# Altium PCB main.PcbDoc (part 1 of 3)
Units mm, origin at the board's own origin, x right, y up, seen from the top; angles counter-clockwise.
Board outline 126 x 86 mm, 2 copper layers (Top Layer, Bottom Layer); 214 components, 256 nets, 850 pads, 614 vias.
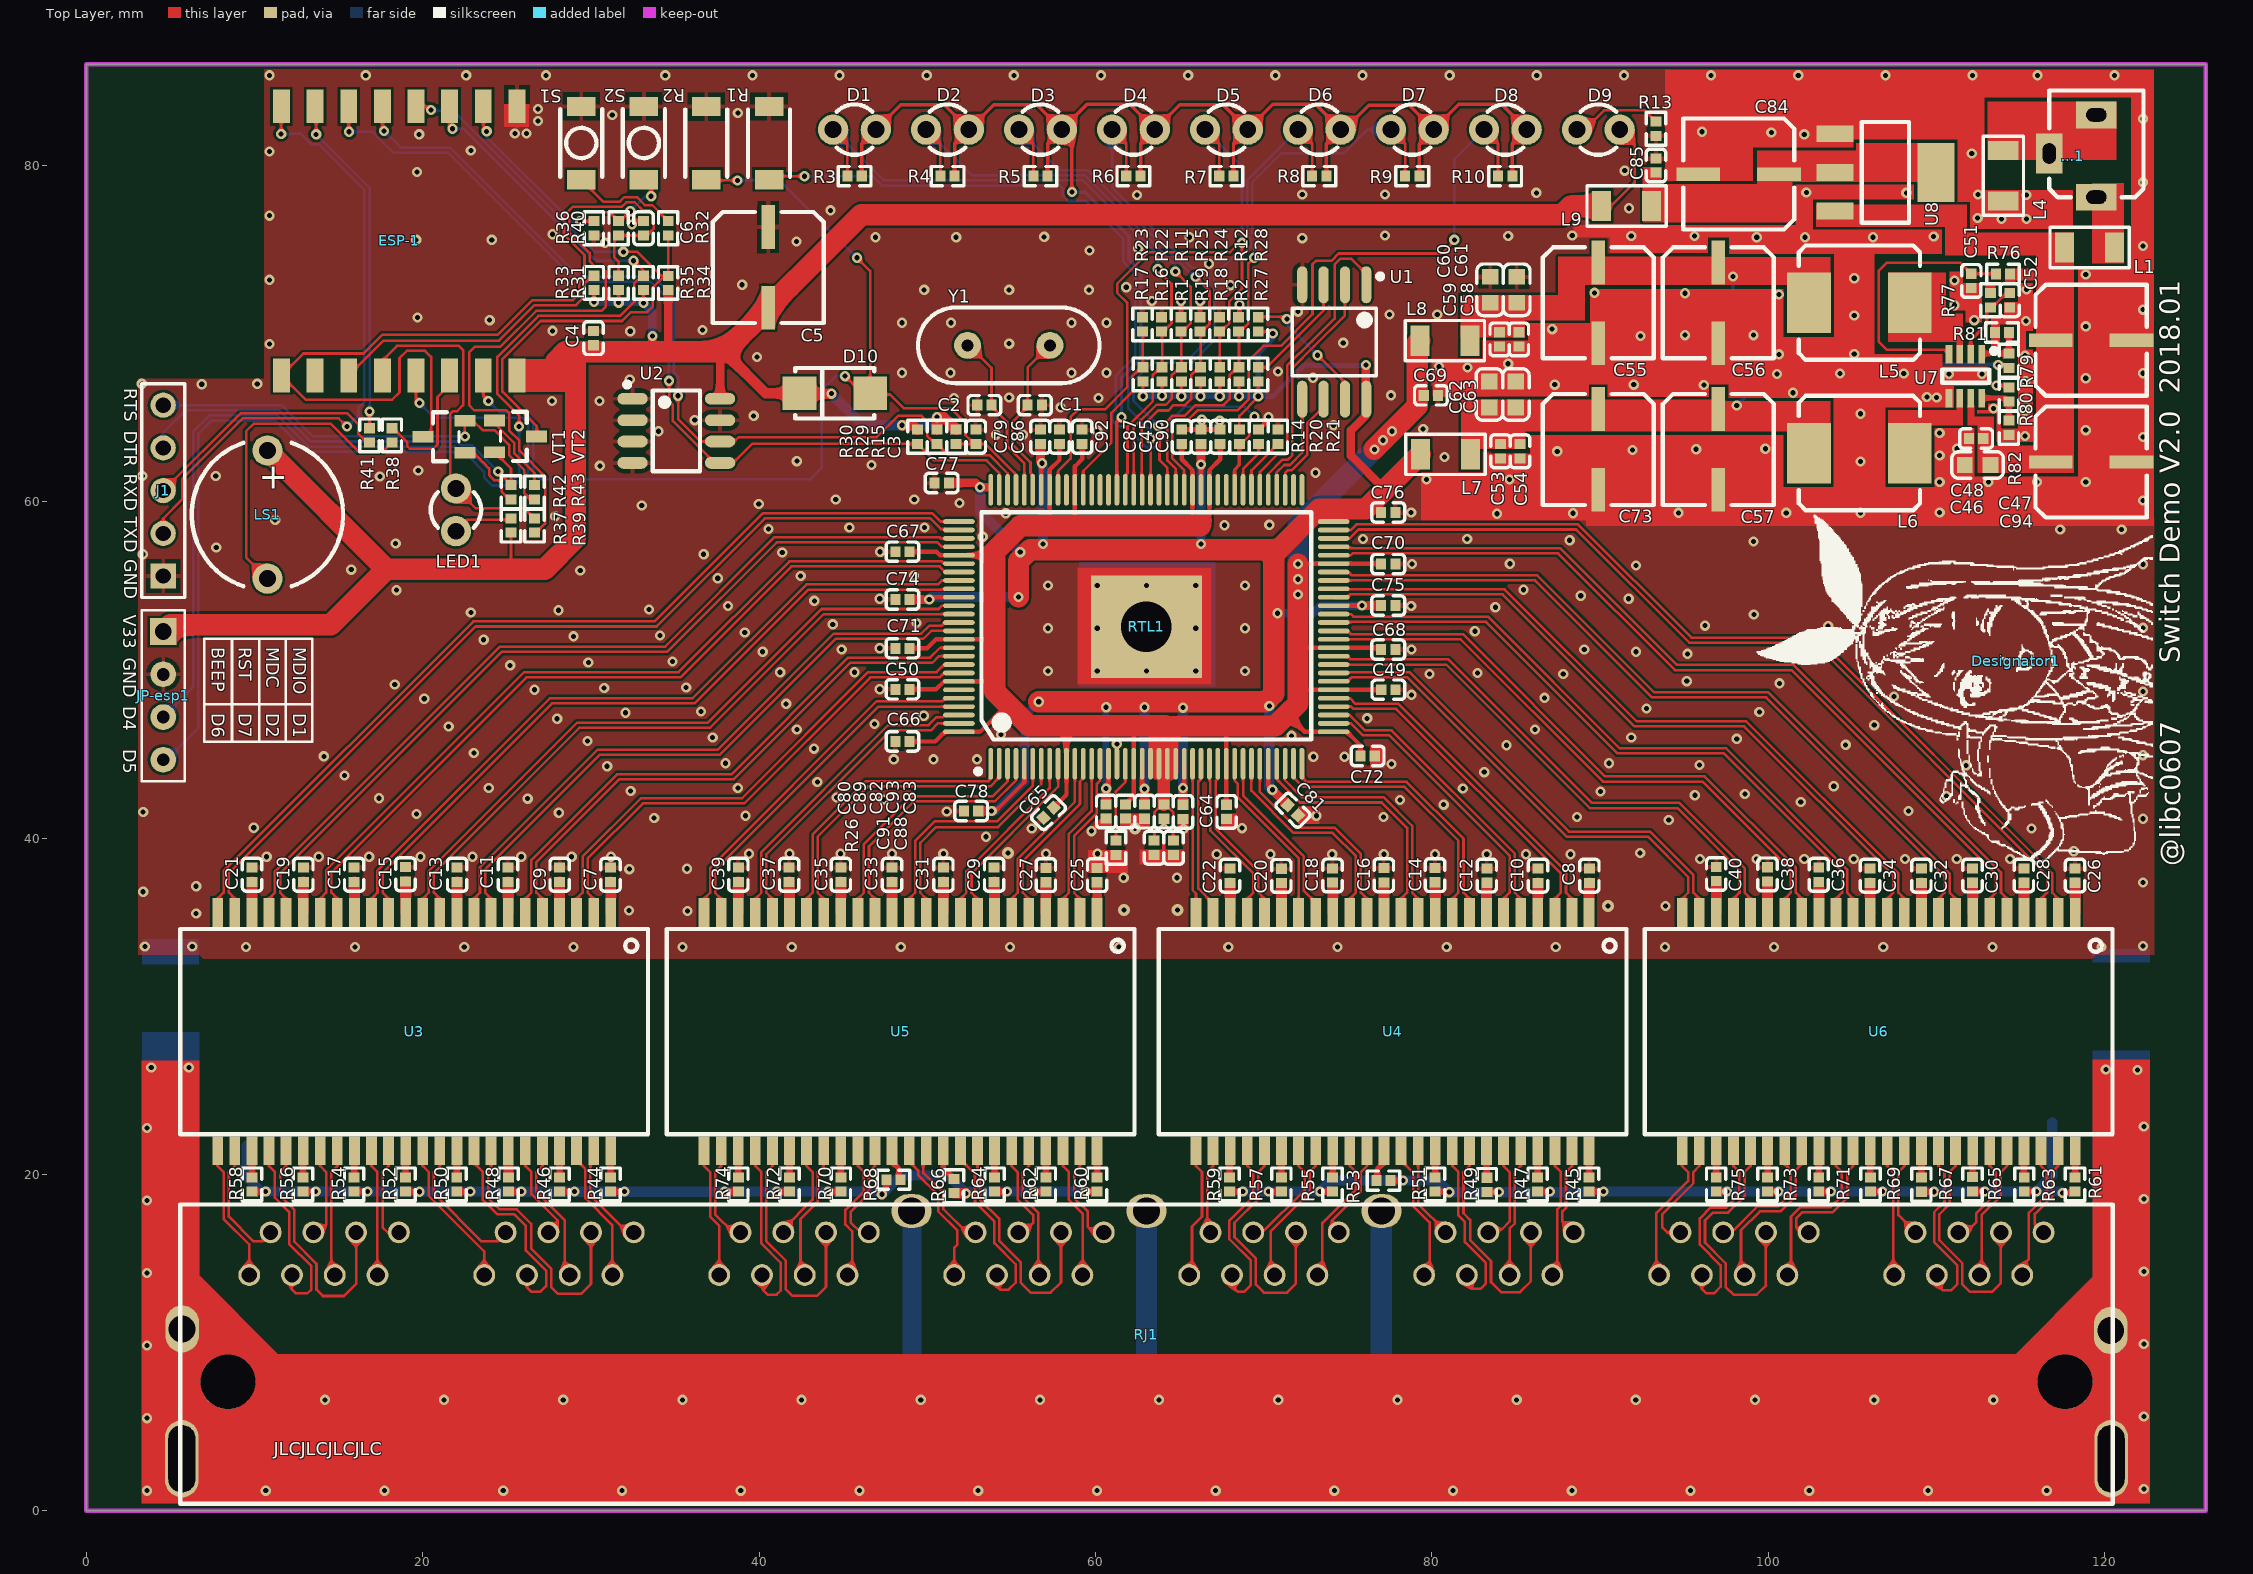
[diagram p0: Top Layer view]
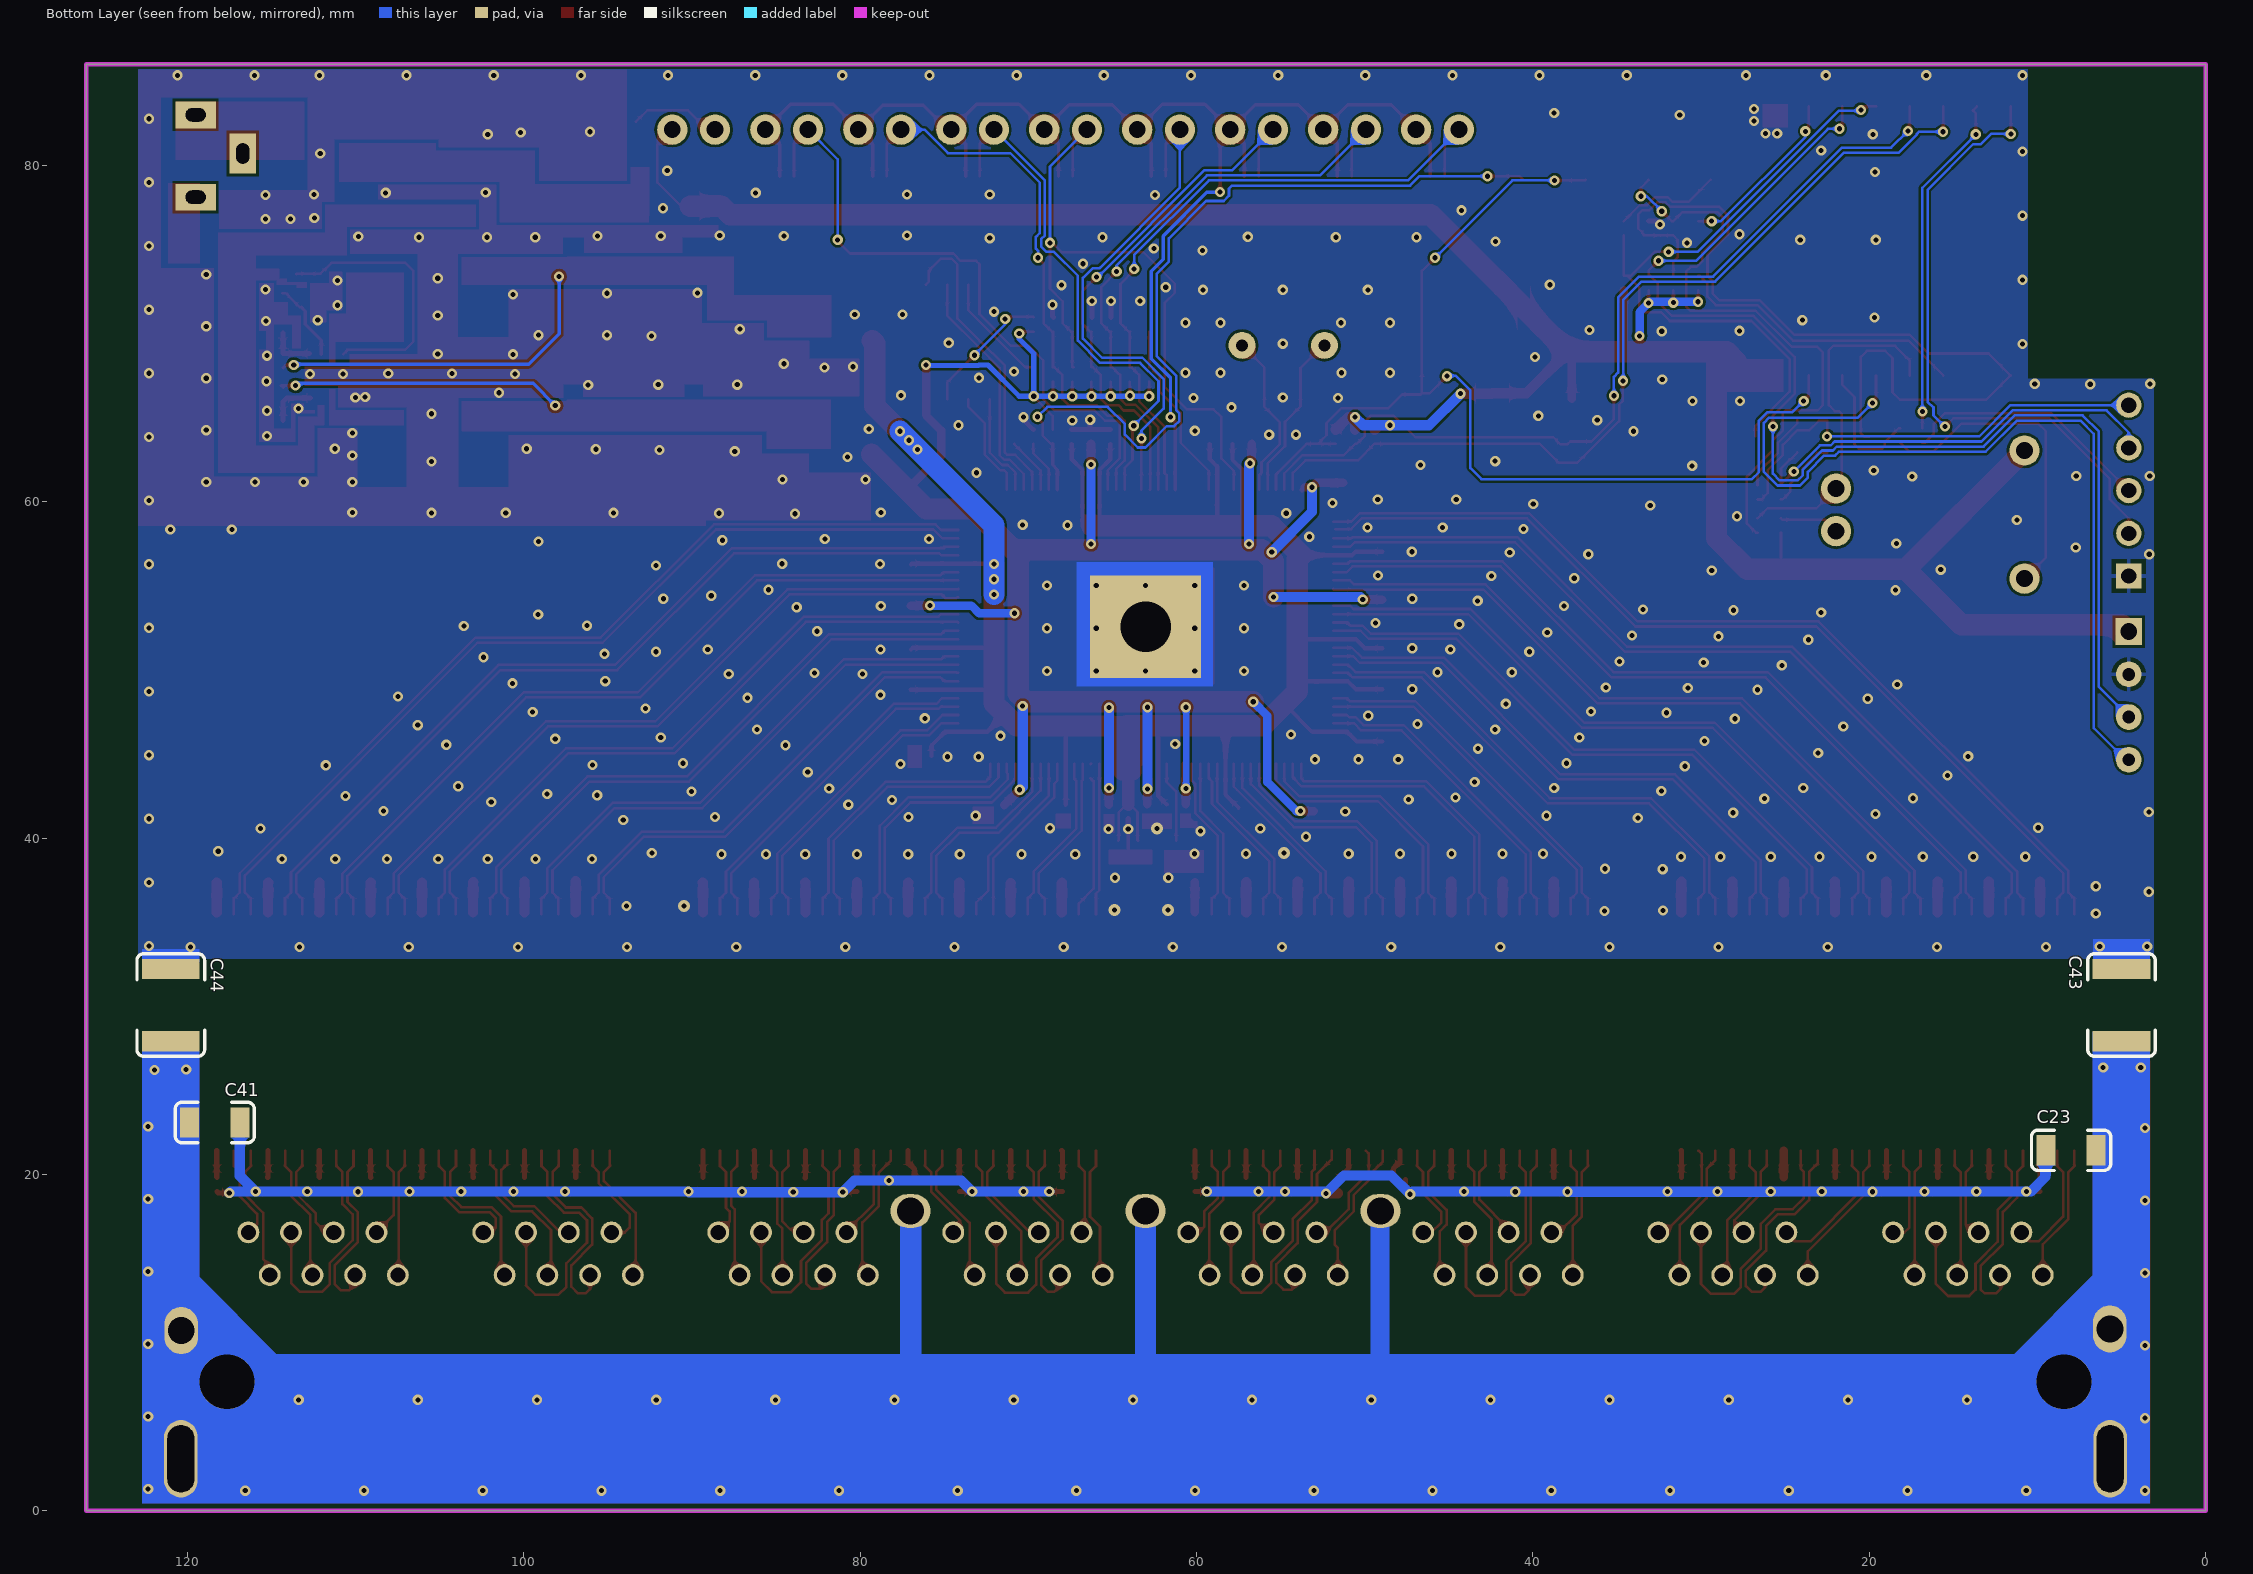
[diagram p1: Bottom Layer view, seen from below]
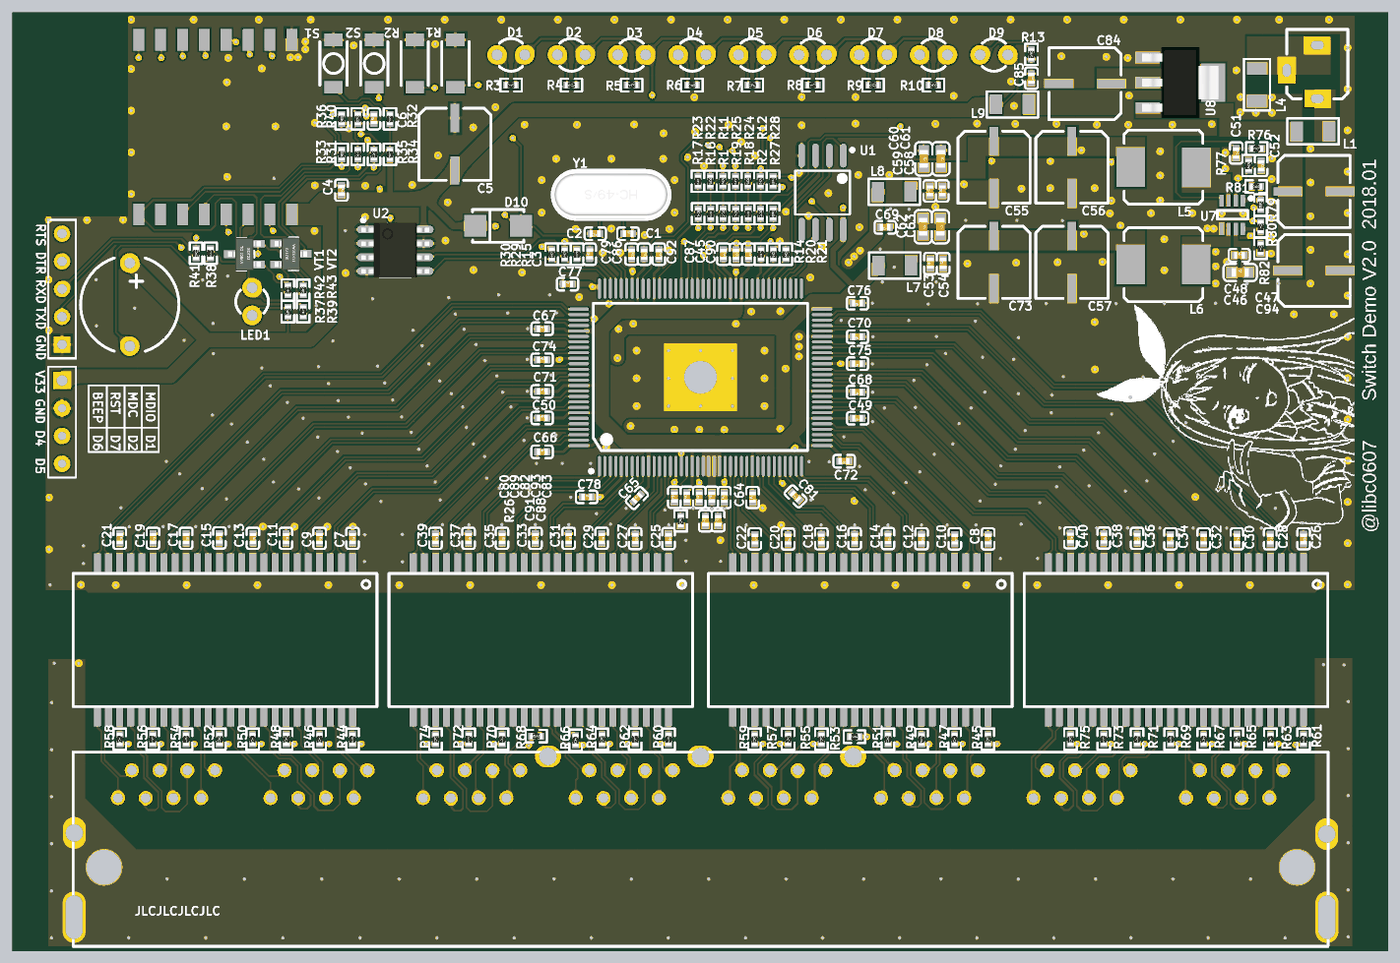
[diagram p4: 3D render of the assembled board from above, using the file's embedded part models]
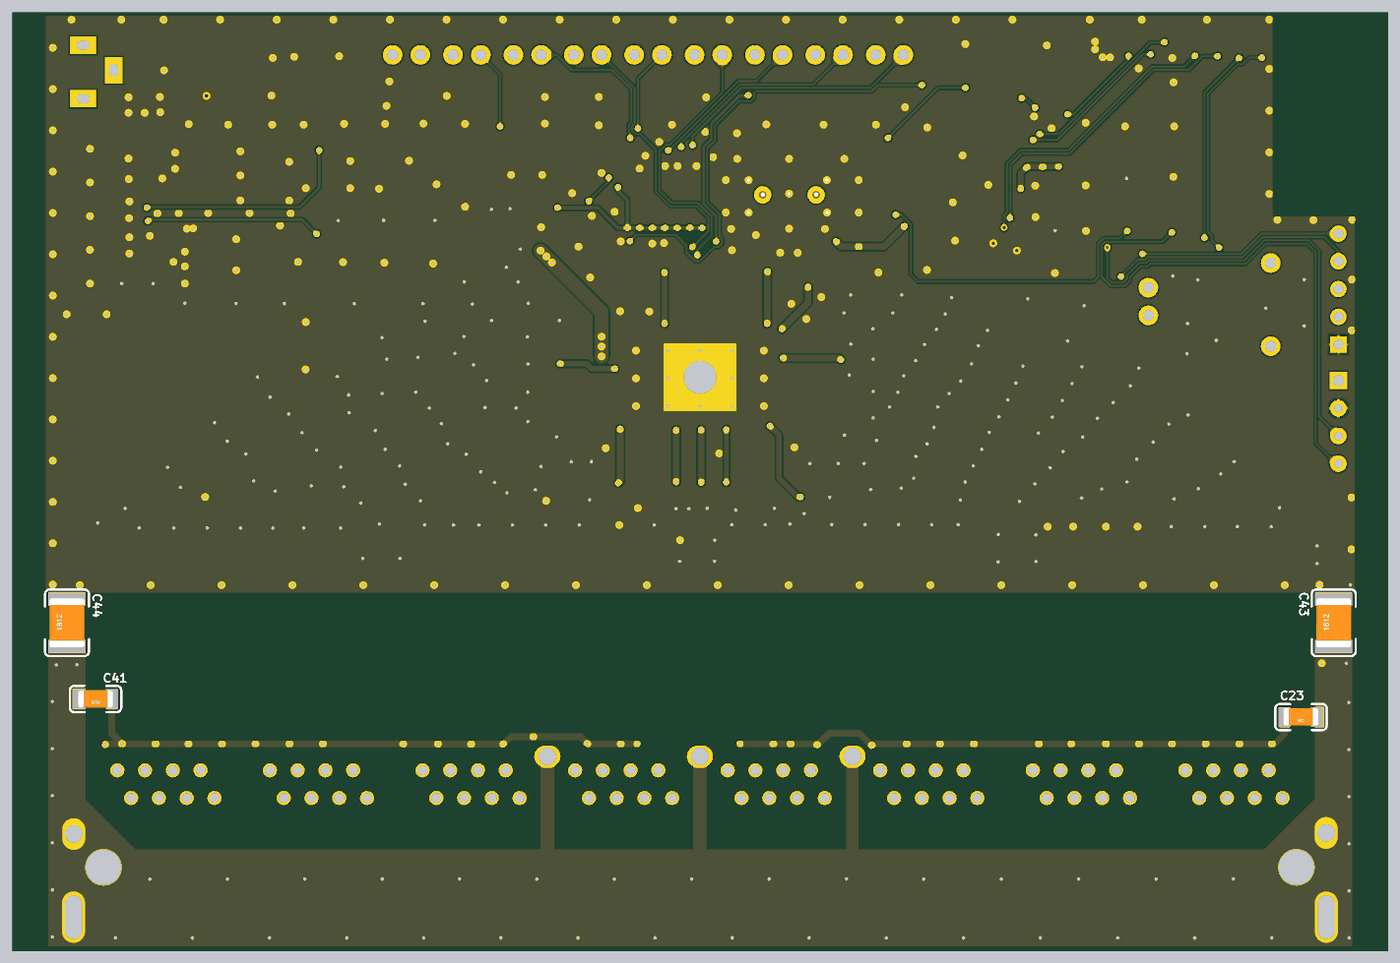
[diagram p5: 3D render of the assembled board from below, using the file's embedded part models]

## Layer stack, top to bottom
Top Solder: solder mask 0.0102, Solder Resist, Dk 3.5
Top Layer: signal copper 0.0356
Dielectric 1: dielectric 0.32, FR-4, Dk 4.8
Bottom Layer: signal copper 0.0356
Bottom Solder: solder mask 0.0102, Solder Resist, Dk 3.5

## Board outline
0,0 0,86 126,86 126,0

## Design rules (kind name [scope] priority, off if disabled: settings)
Clearance [All] p1: gap=0.152 ignorepadtopadclearanceinfootprint=FALSE except(0: Arc-Hole Track-Hole SMDPad-Hole THPad-Hole Via-Hole Fill-Hole Poly-Hole Region-Hole Text-Hole)
ComponentClearance [All] p1: gap=0 collisioncheckmode=3 verticalgap=0 showdistances=FALSE
DiffPairsRouting [All] p1: maxlimit=0.254 minlimit=0.152 mostfreqgap=0.152 toplayer_minwidth=0.152 toplayer_maxwidth=0.254 toplayer_prefwidth=0.152 bottomlayer_minwidth=0.152 bottomlayer_maxwidth=0.254 bottomlayer_prefwidth=0.152 maxuncoupledlength=12.7
HoleSize [All] p1: absolutevalues=TRUE maxlimit=3.81 minlimit=0.305 maxpercent=80.000 minpercent=20.000
HoleToHoleClearance [All] p1: gap=0 allowstackedmicrovias=TRUE
MinimumSolderMaskSliver [All] p1: minsoldermaskwidth=0
PlaneClearance [All] p1: clearance=0.254
PolygonConnect IsVia [IsVia] p1: connectstyle=Direct reliefconductorwidth=0.254 reliefentries=4 polygonreliefangle="90 Angle" airgapwidth=0.254
PolygonConnect [All] p2: connectstyle=Relief reliefconductorwidth=0.254 reliefentries=4 polygonreliefangle="90 Angle" airgapwidth=0.254
RoutingCorners [All] p1: cornerstyle=45-Degree minsetback=1.524 maxsetback=2.54
RoutingVias [All] p1: holewidth=0.305 width=0.711 viastyle="Through Hole" minholewidth=0.305 minwidth=0.61 maxholewidth=0.711 maxwidth=1.27
SilkToSilkClearance [All] p1: silktosilkclearance=0
SilkToSolderMaskClearance [IsPad] p1: minsilkscreentomaskgap=0 clearancetoexposedcopper=TRUE
SolderMaskExpansion [All] p1: expansion=0.051
UnpouredPolygon [All] p1: allowunpoured=TRUE allowshelved=TRUE
Width [All] p1: maxlimit=1.27 minlimit=0.152 preferedwidth=0.152
20 further rules are at their usual default settings.

## Classes and differential pairs
component class rj45: RJ1
component class power: ...1 C45 C46 C47 C48 C49 C50 C51 C52 C53 C54 C55 C56 C57 C58 C59 C60 C61 C62 C63 C64 C65 C66 C67 C68 C69 C70 C71 C72 C73 C74 C75 C76 C77 C78 C79 C80 C81 C82 C83 C84 C85 C86 C87 C88 C89 C90 C91 C92 C93 C94 L1 L4 L5 L6 L7 L8 L9 R76 R77 R79 R80 R81 R82 U7 U8
component class mdi: C7 C8 C9 C10 C11 C12 C13 C14 C15 C16 C17 C18 C19 C20 C21 C22 C23 C25 C26 C27 C28 C29 C30 C31 C32 C33 C34 C35 C36 C37 C38 C39 C40 C41 C43 C44 R44 R45 R46 R47 R48 R49 R50 R51 R52 R53 R54 R55 R56 R57 R58 R59 R60 R61 R62 R63 R64 R65 R66 R67 R68 R69 R70 R71 R72 R73 R74 R75 RTL1 U3 U4 U5 U6
component class mcu: C4 C5 C6 ESP-1 J1 J3 JP-esp1 K LED1 LS1 R31 R32 R33 R34 R35 R36 R37 R38 R39 R40 R41 R42 R43 S1 S2 VT1 VT2
component class config: C1 C2 C3 D1 D2 D3 D4 D5 D6 D7 D8 D9 D10 R1 R2 R3 R4 R5 R6 R7 R8 R9 R10 R11 R12 R13 R14 R15 R16 R17 R18 R19 R20 R21 R22 R23 R24 R25 R26 R27 R28 R29 R30 S-firstboot(SR1 SRESET1 U1 U2 Y1
differential pair P7D: +P7D_P -P7D_N
differential pair P7C: +P7C_P -P7C_N
differential pair P7B: +P7B_P -P7B_N
differential pair P7A: +P7A_P -P7A_N
differential pair P6D: +P6D_P -P6D_N
differential pair P6C: +P6C_P -P6C_N
differential pair P6B: +P6B_P -P6B_N
differential pair P6A: +P6A_P -P6A_N
differential pair P5D: +P5D_P -P5D_N
differential pair P5C: +P5C_P -P5C_N
differential pair P5B: +P5B_P -P5B_N
differential pair P5A: +P5A_P -P5A_N
differential pair P4D: +P4D_P -P4D_N
differential pair P4C: +P4C_P -P4C_N
differential pair P4B: +P4B_P -P4B_N
differential pair P4A: +P4A_P -P4A_N
differential pair P3D: +P3D_P -P3D_N
differential pair P3C: +P3C_P -P3C_N
differential pair P3B: +P3B_P -P3B_N
differential pair P3A: +P3A_P -P3A_N
differential pair P2D: +P2D_P -P2D_N
differential pair P2C: +P2C_P -P2C_N
differential pair P2B: +P2B_P -P2B_N
differential pair P2A: +P2A_P -P2A_N
differential pair P1D: +P1D_P -P1D_N
differential pair P1C: +P1C_P -P1C_N
differential pair P1B: +P1B_P -P1B_N
differential pair P1A: +P1A_P -P1A_N
differential pair P0D: +P0D_P -P0D_N
differential pair P0C: +P0C_P -P0C_N
differential pair P0B: +P0B_P -P0B_N
differential pair P0A: +P0A_P -P0A_N
differential pair N7D: +N7D_P -N7D_N
differential pair N7C: +N7C_P -N7C_N
differential pair N7B: +N7B_P -N7B_N
differential pair N7A: +N7A_P -N7A_N
differential pair N6D: +N6D_P -N6D_N
differential pair N6C: +N6C_P -N6C_N
differential pair N6B: +N6B_P -N6B_N
differential pair N6A: +N6A_P -N6A_N
differential pair N5D: +N5D_P -N5D_N
differential pair N5C: +N5C_P -N5C_N
differential pair N5B: +N5B_P -N5B_N
differential pair N5A: +N5A_P -N5A_N
differential pair N4D: +N4D_P -N4D_N
differential pair N4C: +N4C_P -N4C_N
differential pair N4B: +N4B_P -N4B_N
differential pair N4A: +N4A_P -N4A_N
differential pair N3D: +N3D_P -N3D_N
differential pair N3C: +N3C_P -N3C_N
differential pair N3B: +N3B_P -N3B_N
differential pair N3A: +N3A_P -N3A_N
differential pair N2D: +N2D_P -N2D_N
differential pair N2C: +N2C_P -N2C_N
differential pair N2B: +N2B_P -N2B_N
differential pair N2A: +N2A_P -N2A_N
differential pair N1D: +N1D_P -N1D_N
differential pair N1C: +N1C_P -N1C_N
differential pair N1B: +N1B_P -N1B_N
differential pair N1A: +N1A_P -N1A_N
differential pair N0D: +N0D_P -N0D_N
differential pair N0C: +N0C_P -N0C_N
differential pair N0B: +N0B_P -N0B_N
differential pair N0A: +N0A_P -N0A_N

## Components (designator, comment, footprint, x,y, rotation, side; value= is the part's Value field where it differs from the comment)
...1 "DC插座" 3.5x1.3-DC插座 119.5,78.1 r270 top locked
C1 "Cap" 0402_C 56.388,65.735 r0 top value=27pF
C2 "Cap" 0402_C 53.391,65.735 r180 top value=27pF
C3 "Cap" 0402_C 52.883,63.856 r90 top value=0.1uF
C4 "100nF" 0402_C 30.15,69.723 r270 top
C5 "100uF" 6.3mm贴片铝电解 43.838,70.627 r90 top
C6 "100nF" 0402_C 33.122,76.251 r90 top
C7 "Cap" 0402_C 31.166,37.821 r270 top value=100pF
C8 "Cap" 0402_C 89.357,37.763 r270 top value=100pF
C9 "Cap" 0402_C 28.143,37.821 r270 top value=100pF
C10 "Cap" 0402_C 86.309,37.763 r270 top value=100pF
C11 "Cap" 0402_C 25.07,37.821 r270 top value=100pF
C12 "Cap" 0402_C 83.261,37.77 r270 top value=100pF
C13 "Cap" 0402_C 22.047,37.821 r270 top value=100pF
C14 "Cap" 0402_C 80.188,37.795 r270 top value=100pF
C15 "Cap" 0402_C 18.974,37.846 r270 top value=100pF
C16 "Cap" 0402_C 77.14,37.788 r270 top value=100pF
C17 "Cap" 0402_C 15.926,37.821 r270 top value=100pF
C18 "Cap" 0402_C 74.092,37.777 r270 top value=100pF
C19 "Cap" 0402_C 12.903,37.821 r270 top value=100pF
C20 "Cap" 0402_C 71.044,37.751 r270 top value=100pF
C21 "Cap" 0402_C 9.855,37.821 r270 top value=100pF
C22 "Cap" 0402_C 67.996,37.763 r270 top value=100pF
C23 "Cap" 1206_C 8.001,21.438 r0 bottom value=100pF
C25 "Cap" 0402_C 60.096,37.795 r270 top value=100pF
C26 "Cap" 0402_C 118.237,37.77 r270 top value=100pF
C27 "Cap" 0402_C 57.048,37.795 r270 top value=100pF
C28 "Cap" 0402_C 115.189,37.77 r270 top value=100pF
C29 "Cap" 0402_C 53.975,37.821 r270 top value=100pF
C30 "Cap" 0402_C 112.141,37.77 r270 top value=100pF
C31 "Cap" 0402_C 50.952,37.821 r270 top value=100pF
C32 "Cap" 0402_C 109.093,37.763 r270 top value=100pF
C33 "Cap" 0402_C 47.904,37.821 r270 top value=100pF
C34 "Cap" 0402_C 106.045,37.763 r270 top value=100pF
C35 "Cap" 0402_C 44.856,37.821 r270 top value=100pF
C36 "Cap" 0402_C 102.997,37.814 r270 top value=100pF
C37 "Cap" 0402_C 41.783,37.821 r270 top value=100pF
C38 "Cap" 0402_C 99.949,37.839 r270 top value=100pF
C39 "Cap" 0402_C 38.76,37.821 r270 top value=100pF
C40 "Cap" 0402_C 96.901,37.865 r270 top value=100pF
C41 "Cap" 1206_C 118.364,23.089 r0 bottom value=100pF
C43 "Cap" 1812_C 5.004,30.074 r90 bottom value=100pF
C44 "Cap" 1812_C 120.98,30.074 r90 bottom value=100pF
C45 "Cap" 0402_C 66.269,63.856 r270 top value=100pF
C46 "Cap" 0603_C 112.438,62.179 r0 top value=100pF
C47 "Cap Pol1" 6.3mm贴片铝电解 122.49,72.896 r180 top value=100pF
C48 "Cap" 0402_C 112.351,63.754 r0 top value=100pF
C49 "Cap" 0402_C 77.412,48.819 r180 top value=100pF
C50 "Cap" 0402_C 48.523,48.844 r0 top value=100pF
C51 "Cap" 0402_C 112.065,73.127 r270 top value=100pF
C52 "Cap" 0402_C 114.351,71.977 r270 top value=100pF
C53 "Cap" 0402_C 84.074,62.999 r90 top value=100pF
C54 "Cap" 0402_C 85.242,62.992 r90 top value=100pF
C55 "Cap Pol1" 6.3mm贴片铝电解 93.191,68.518 r90 top value=100pF
C56 "Cap Pol1" 6.3mm贴片铝电解 100.328,68.518 r90 top value=100pF
C57 "Cap Pol1" 6.3mm贴片铝电解 100.328,59.806 r90 top value=100pF
C58 "Cap" 0402_C 85.166,69.647 r90 top value=100pF
C59 "Cap" 0402_C 84.023,69.647 r90 top value=100pF
C60 "Cap" 0603_C 83.464,72.593 r270 top value=100pF
C61 "Cap" 0603_C 85.039,72.593 r270 top value=100pF
C62 "Cap" 0603_C 83.414,66.37 r270 top value=100pF
C63 "Cap" 0603_C 84.988,66.37 r270 top value=100pF
C64 "Cap" 0402_C 67.793,41.554 r90 top value=100pF
C65 "Cap" 0402_C 57.205,41.508 r45 top value=100pF
C66 "Cap" 0402_C 48.523,45.745 r0 top value=100pF
C67 "Cap" 0402_C 48.523,57.023 r0 top value=100pF
C68 "Cap" 0402_C 77.401,51.206 r180 top value=100pF
C69 "Cap" 0402_C 79.941,66.319 r180 top value=100pF
C70 "Cap" 0402_C 77.401,56.286 r180 top value=100pF
C71 "Cap" 0402_C 48.523,51.283 r0 top value=100pF
C72 "Cap" 0402_C 76.175,44.882 r180 top value=100pF
C73 "Cap Pol1" 6.3mm贴片铝电解 93.191,59.806 r90 top value=100pF
C74 "Cap" 0402_C 48.523,54.178 r0 top value=100pF
C75 "Cap" 0402_C 77.401,53.823 r180 top value=100pF
C76 "Cap" 0402_C 77.401,59.36 r180 top value=100pF
C77 "Cap" 0402_C 50.851,61.112 r0 top value=100pF
C78 "Cap" 0402_C 52.603,41.605 r0 top value=100pF
C79 "Cap" 0402_C 56.718,63.856 r270 top value=100pF
C80 "Cap" 0402_C 60.63,41.58 r90 top value=100pF
C81 "Cap" 0402_C 71.734,41.652 r135 top value=100pF
C82 "Cap" 0402_C 62.916,41.573 r90 top value=100pF
C83 "Cap" 0402_C 65.202,41.554 r90 top value=100pF
C84 "Cap Pol1" 6.3mm贴片铝电解 94.935,76.177 r0 top value=100uF
C85 "Cap" 0402_C 93.32,79.985 r270 top value=100nF
C86 "Cap" 0402_C 57.861,63.856 r270 top value=100pF
C87 "Cap" 0402_C 65.126,63.856 r270 top value=100pF
C88 "Cap" 0402_C 64.643,39.421 r90 top value=100pF
C89 "Cap" 0402_C 61.773,41.58 r90 top value=100pF
C90 "Cap" 0402_C 67.412,63.856 r270 top value=100pF
C91 "Cap" 0402_C 63.475,39.421 r90 top value=100pF
C92 "Cap" 0402_C 59.207,63.856 r270 top value=100pF
C93 "Cap" 0402_C 64.059,41.573 r90 top value=100pF
C94 "Cap Pol1" 6.3mm贴片铝电解 122.49,65.657 r180 top value=100pF
D1 "LED0" LED。。 45.669,82.118 r0 top
D2 "LED0" LED。。 51.197,82.118 r0 top
D3 "LED0" LED。。 56.725,82.118 r0 top
D4 "LED0" LED。。 62.252,82.118 r0 top
D5 "LED0" LED。。 67.78,82.118 r0 top
D6 "LED0" LED。。 73.308,82.118 r0 top
D7 "LED0" LED。。 78.835,82.118 r0 top
D8 "LED0" LED。。 84.363,82.118 r0 top
D9 "Power LED" LED。。 89.891,82.119 r180 top
D10 "M7" SMA(DO-214AC)_S1 44.501,66.446 r0 top
Designator1 "Comment" Hideri-chan 114.706,50.546 r90 top
ESP-1 "ESP-12F" ESP-12S 27.1,65.5 r90 top locked
J1 "5pin-download" HDR1X5 4.572,55.575 r90 top
JP-esp1 "JP-4" Header-2.54-1x4 4.572,52.273 r270 top
L1 "Inductor" 1206_L 119.101,75.108 r0 top value=10mH
L4 "Inductor" 1206_L 113.97,79.375 r90 top value=10mH
L5 "Inductor" 0630贴片功率电感 108.413,71.831 r0 top value=10mH
L6 "Inductor" 0630贴片功率电感 108.413,62.89 r0 top value=10mH
L7 "Inductor" 1206_L 80.806,62.814 r180 top value=10mH
L8 "Inductor" 1206_L 80.772,69.571 r0 top value=10mH
L9 "Inductor" 1206_L 91.576,77.572 r0 top value=10mH
LED1 "BLUE" LED。。 21.971,59.512 r90 top
LS1 "Buzzer" Beeper 10.77,59.233 r90 top
R1 "SW-SPST" 3*4微动 40.589,84.071 r270 top (schematic designator S-firstboot(SR1)
R1 "Res2" LC-0402_R 65.1,67.564 r90 top value=4.7K
R2 "SW-SPST" 3*4微动 36.855,84.065 r270 top (schematic designator SRESET1)
R2 "Res2" LC-0402_R 68.529,67.564 r90 top value=4.7K
R3 "Res2" LC-0402_R 45.676,79.35 r0 top value=30K
R4 "Res2" LC-0402_R 51.201,79.35 r0 top value=30K
R5 "Res2" LC-0402_R 56.727,79.35 r0 top value=30K
R6 "Res2" LC-0402_R 62.252,79.35 r0 top value=30K
R7 "Res2" LC-0402_R 67.777,79.35 r0 top value=30K
R8 "Res2" LC-0402_R 73.303,79.35 r0 top value=30K
R9 "Res2" LC-0402_R 78.828,79.35 r0 top value=30K
R10 "Res2" LC-0402_R 84.353,79.35 r0 top value=30K
R11 "Res2" LC-0402_R 65.075,70.536 r90 top value=4.7K
R12 "Res2" LC-0402_R 68.504,70.536 r90 top value=4.7k
R13 "Res2" LC-0402_R 93.32,82.169 r270 top value=4.7K
R14 "Res2" LC-0402_R 68.555,63.856 r90 top value=4.7K
R15 "Res2" LC-0402_R 51.714,63.856 r270 top value=4.7K
R16 "Res2" LC-0402_R 63.957,67.564 r90 top value=4.7K
R17 "Res2" LC-0402_R 62.814,67.564 r90 top value=4.7K
R18 "Res2" LC-0402_R 67.386,67.564 r90 top value=4.7K
R19 "Res2" LC-0402_R 66.243,67.564 r90 top value=4.7k
R20 "Res2" LC-0402_R 69.698,63.856 r90 top value=4.7K
R21 "Res2" LC-0402_R 70.841,63.856 r90 top value=4.7K
R22 "Res2" LC-0402_R 63.932,70.536 r90 top value=4.7K
R23 "Res2" LC-0402_R 62.789,70.536 r90 top value=4.7k
R24 "Res2" LC-0402_R 67.361,70.536 r90 top value=4.7k
R25 "Res2" LC-0402_R 66.218,70.536 r90 top value=4.7k
R26 "Res2" LC-0402_R 61.214,39.421 r270 top value=2.49k
R27 "Res2" LC-0402_R 69.672,67.564 r270 top value=4.7K
R28 "Res2" LC-0402_R 69.672,70.536 r270 top value=4.7K
R29 "Res2" LC-0402_R 50.571,63.856 r90 top value=4.7K
R30 "Res2" LC-0402_R 49.403,63.856 r90 top value=4.7K
R31 "Res2" LC-0402_R 31.648,73.006 r90 top value=12k
R32 "470" 0402_R 34.595,76.251 r270 top
R33 "Res2" LC-0402_R 30.175,73.006 r90 top value=12k
R34 "Res2" LC-0402_R 34.595,73 r270 top value=12k
R35 "Res2" LC-0402_R 33.122,73.006 r270 top value=12k
R36 "Res2" LC-0402_R 30.175,76.251 r90 top value=12k
R37 "470" 0402_R 25.248,58.579 r270 top
R38 "4.7k" 0402_R 18.161,63.939 r90 top
R39 "0(NC)" 0402_R 26.645,58.579 r90 top
R40 "470" 0402_R 31.648,76.251 r270 top
R41 "470" 0402_R 16.84,63.939 r90 top
R42 "12k" 0402_R 25.248,60.56 r90 top
R43 "12k" 0402_R 26.645,60.554 r270 top
R44 "Res2" LC-0402_R 31.166,19.406 r270 top value=1K
R45 "Res2" LC-0402_R 89.332,19.406 r270 top value=1K
R46 "Res2" LC-0402_R 28.143,19.406 r270 top value=1K
R47 "Res2" LC-0402_R 86.284,19.406 r270 top value=1K
R48 "Res2" LC-0402_R 25.095,19.406 r270 top value=1K
R49 "Res2" LC-0402_R 83.261,19.38 r270 top value=1K
R50 "Res2" LC-0402_R 22.022,19.406 r270 top value=1K
R51 "Res2" LC-0402_R 80.188,19.406 r270 top value=1K
R52 "Res2" LC-0402_R 18.974,19.406 r270 top value=1K
R53 "Res2" LC-0402_R 77.121,19.634 r0 top value=1K
R54 "Res2" LC-0402_R 15.926,19.406 r270 top value=1K
R55 "Res2" LC-0402_R 74.092,19.406 r270 top value=1K
R56 "Res2" LC-0402_R 12.878,19.406 r270 top value=1K
R57 "Res2" LC-0402_R 71.044,19.406 r270 top value=1K
R58 "Res2" LC-0402_R 9.855,19.406 r270 top value=1K
R59 "Res2" LC-0402_R 67.97,19.406 r270 top value=1K
R60 "Res2" LC-0402_R 60.096,19.406 r270 top value=1K
R61 "Res2" LC-0402_R 118.237,19.406 r270 top value=1K
R62 "Res2" LC-0402_R 57.048,19.406 r270 top value=1K
R63 "Res2" LC-0402_R 115.214,19.406 r270 top value=1K
R64 "Res2" LC-0402_R 54,19.406 r270 top value=1K
R65 "Res2" LC-0402_R 112.141,19.412 r270 top value=1K
R66 "Res2" LC-0402_R 51.587,19.311 r270 top value=1K
R67 "Res2" LC-0402_R 109.093,19.399 r270 top value=1K
R68 "Res2" LC-0402_R 47.987,19.685 r180 top value=1K
R69 "Res2" LC-0402_R 106.07,19.406 r270 top value=1K
R70 "Res2" LC-0402_R 44.856,19.406 r270 top value=1K
R71 "Res2" LC-0402_R 102.997,19.406 r270 top value=1K
R72 "Res2" LC-0402_R 41.808,19.406 r270 top value=1K
R73 "Res2" LC-0402_R 99.949,19.406 r270 top value=1K
R74 "Res2" LC-0402_R 38.76,19.406 r270 top value=1K
R75 "Res2" LC-0402_R 96.901,19.406 r270 top value=1K
R76 "Res2" LC-0402_R 113.951,73.533 r0 top value=1K
R77 "Res2" LC-0402_R 113.208,71.977 r90 top value=1K
R79 "Res2" LC-0402_R 114.3,68.377 r270 top value=806k
R80 "Res2" LC-0402_R 114.3,66.37 r90 top value=806K
R81 "Res2" LC-0402_R 113.894,70.053 r0 top value=1.2M
R82 "Res2" LC-0402_R 114.3,64.389 r90 top value=1.2M
RJ1 "RJ45-8ports" 8口千兆 117.639,7.669 r0 top locked
RTL1 "RTL8370" TQFP-128_20x14x05P----epad 63.02,52.565 r0 top locked
S1 "KEY_FLASH" 3*4微动 29.424,78.573 r90 top locked
S2 "KEY_RST/USER" 3*4微动 33.149,78.573 r90 top locked
U1 "W25q80" SOP-8_208mil 74.193,69.494 r180 top
U2 "24c02" SOP-8_150mil 35.077,64.211 r270 top
U3 "双千兆网变" H5014NL/H84801NL 19.494,28.499 r180 top locked
U4 "双千兆网变" H5014NL/H84801NL 77.658,28.499 r180 top locked
U5 "双千兆网变" H5014NL/H84801NL 48.41,28.499 r180 top locked
U6 "双千兆网变" H5014NL/H84801NL 106.561,28.499 r180 top locked
U7 "MP2122" TSOT-23-8 111.709,67.462 r180 top
U8 "AMS1117" SOT-223 106.959,79.578 r180 top
VT1 "S8050" SOT-23(SOT-23-3) 21.26,63.856 r0 top
VT2 "S8050" SOT-23(SOT-23-3) 25.527,63.881 r180 top
Y1 "XTAL" HC-49S 54.839,69.291 r180 top

## Footprints (in the part's own frame and the unit in brackets; to place one, negate y for a bottom-side part, rotate by r counter-clockwise, add the part's x,y. Pads: shape width x height; smd on the part's side, far side on the other; paste and mask are expansions set on the pad)
3*4微动 [mm]
  rect 1.15x1.7 smd: 1(0.575,0) 2(4.925,0)
  silkscreen extent 0.75,-1.25 4.75,1.25, body extent 0.75,-1.25 4.75,1.25, height 2
3.5x1.3-DC插座 [mm]
  rect 1.6x2.4 hole 0.8 slot 1.2 at 90 deg: 1(0,0) 3(-4.9,0)
  rect 2.4x1.6 hole 0.8 slot 1.2 at 0 deg: 2(-2.6,-2.8)
  silkscreen extent -6.35,-2.8 0,2.8, body extent -10.9,-2.5 0,2.5, height 7.4
6.3mm贴片铝电解 [mm]
  rect 2.6x0.8 smd: 1(0.9,3.3) 2(5.7,3.3)
  silkscreen extent 0,0 6.6,6.6, body extent 0,0 6.6,6.6, height 8
8口千兆 [mm]
  oval 2x4.6 hole 1.6 slot 4 at 90 deg: 0(-111.96,-4.57) 0(2.74,-4.57)
  oval 2x2.8 hole 1.6: 0(-111.94,3.15) 0(2.72,3.05)
  round 3.25 hole 3.25: 0(-109.22,0) 0(0,0)
  oval 2.4x2 hole 1.6: 0(-68.58,10.16) 0(-54.61,10.16) 0(-40.64,10.16)
  round 1.3 hole 0.9: 1(-107.95,6.35) 2(-106.68,8.89) 3(-105.41,6.35) 4(-104.14,8.89) 5(-102.87,6.35) 6(-101.6,8.89) 7(-100.33,6.35) 8(-99.06,8.89) 9(-93.98,6.35) 10(-92.71,8.89) 11(-91.44,6.35) 12(-90.17,8.89) 13(-88.9,6.35) 14(-87.63,8.89) 15(-86.36,6.35) 16(-85.09,8.89) 17(-80.01,6.35) 18(-78.74,8.89) 19(-77.47,6.35) 20(-76.2,8.89) 21(-74.93,6.35) 22(-73.66,8.89) 23(-72.39,6.35) 24(-71.12,8.89) 25(-66.04,6.35) 26(-64.77,8.89) 27(-63.5,6.35) 28(-62.23,8.89) 29(-60.96,6.35) 30(-59.69,8.89) 31(-58.42,6.35) 32(-57.15,8.89) 33(-52.07,6.35) 34(-50.8,8.89) 35(-49.53,6.35) 36(-48.26,8.89) 37(-46.99,6.35) 38(-45.72,8.89) 39(-44.45,6.35) 40(-43.18,8.89) 41(-38.1,6.35) 42(-36.83,8.89) 43(-35.56,6.35) 44(-34.29,8.89) 45(-33.02,6.35) 46(-31.75,8.89) 47(-30.48,6.35) 48(-29.21,8.89) 49(-24.13,6.35) 50(-22.86,8.89) 51(-21.59,6.35) 52(-20.32,8.89) 53(-19.05,6.35) 54(-17.78,8.89) 55(-16.51,6.35) 56(-15.24,8.89) 57(-10.16,6.35) 58(-8.89,8.89) 59(-7.62,6.35) 60(-6.35,8.89) 61(-5.08,6.35) 62(-3.81,8.89) 63(-2.54,6.35) 64(-1.27,8.89)
  silkscreen extent -112.06,-7.25 2.84,10.55, body extent -112.06,-10.75 2.84,10.55, height 13.65
0402_C [mm]
  rect 0.6x0.65 smd mask+0.051: 1(-0.425,0) 2(0.425,0)
  silkscreen extent -0.97,-0.58 0.97,0.58, body extent -0.48,-0.3 0.52,0.3, height 0.2
0402_R [mm]
  rect 0.6x0.65 smd mask+0.051: 1(-0.425,0) 2(0.425,0)
  silkscreen extent -0.97,-0.58 0.97,0.58, body extent -0.57,-0.27 0.58,0.28, height 0.41
0603_C [mm]
  rect 0.93x0.98 smd: 1(-0.77,0) 2(0.77,0)
  silkscreen extent -1.53,-0.79 1.54,0.79, body extent -0.8,-0.4 0.8,0.4, height 0.3
0630贴片功率电感 [mm]
  rect 2.6x3.6 smd: 1(0,0) 2(-6,0)
  silkscreen extent -6.6,-3.4 0.6,3.4, body extent -6.6,-3.4 0.6,3.4, height 3
1206_C [mm]
  rect 1.13x1.8 smd: 1(-1.49,0) 2(1.49,0)
  silkscreen extent -2.36,-1.2 2.35,1.2, body extent -1.6,-0.81 1.6,0.79, height 1
1206_L [mm]
  rect 1.13x1.8 smd: 1(-1.49,0) 2(1.49,0)
  silkscreen extent -2.36,-1.2 2.35,1.2
1812_C [mm]
  rect 1.2x3.42 smd: 1(-2.15,0) 2(2.15,0)
  silkscreen extent -3.05,-2.01 3.05,2.01, body extent -2.25,-1.6 2.25,1.6, height 1.6
Beeper [mm]
  round 1.8 hole 1: 1(-3.81,0) 2(3.81,0)
  silkscreen extent -4.27,-4.5 4.27,4.5
ESP-12S [mm]
  rect 2x1 smd: 1(2,15.5) 2(2,13.5) 3(2,11.5) 4(2,9.5) 5(2,7.5) 6(2,5.5) 7(2,3.5) 8(2,1.5) 9(18,1.5) 10(18,3.5) 11(18,5.5) 12(18,7.5) 13(18,9.5) 14(18,11.5) 15(18,13.5) 16(18,15.5)
  body extent 2,0 18,24, height 2
H5014NL/H84801NL [mm] "双千兆网络变压器"
  rect 0.64x1.7 smd: 1(-11.684,-7.077) 2(-10.668,-7.077) 3(-9.652,-7.077) 4(-8.636,-7.077) 5(-7.62,-7.077) 6(-6.604,-7.077) 7(-5.588,-7.077) 8(-4.572,-7.077) 9(-3.556,-7.077) 10(-2.54,-7.077) 11(-1.524,-7.077) 12(-0.508,-7.077) 13(0.508,-7.077) 14(1.524,-7.077) 15(2.54,-7.077) 16(3.556,-7.077) 17(4.572,-7.077) 18(5.588,-7.077) 19(6.604,-7.077) 20(7.62,-7.077) 21(8.636,-7.077) 22(9.652,-7.077) 23(10.668,-7.077) 24(11.684,-7.077) 25(11.684,7.078) 26(10.668,7.078) 27(9.652,7.078) 28(8.636,7.078) 29(7.62,7.078) 30(6.604,7.078) 31(5.588,7.078) 32(4.572,7.078) 33(3.556,7.078) 34(2.54,7.078) 35(1.524,7.078) 36(0.508,7.078) 37(-0.508,7.078) 38(-1.524,7.078) 39(-2.54,7.078) 40(-3.556,7.078) 41(-4.572,7.078) 42(-5.588,7.078) 43(-6.604,7.078) 44(-7.62,7.078) 45(-8.636,7.078) 46(-9.652,7.078) 47(-10.668,7.078) 48(-11.684,7.078)
  silkscreen extent -13.9,-6.1 13.91,6.1, body extent -13.9,-6.1 13.9,6.1, height 7.24
HC-49S [mm]
  round 1.6 hole 0.7: 1(-2.45,0) 2(2.45,0)
  silkscreen extent -5.39,-2.25 5.39,2.25, body extent -5.39,-2.27 5.41,2.23, height 3.6
HDR1X5 [mm] "Connector; Header; 5 Position"
  rect 1.5x1.5 hole 0.9: 1(0,0)
  round 1.5 hole 0.9: 2(2.54,0) 3(5.08,0) 4(7.62,0) 5(10.16,0)
  silkscreen extent -1.27,-1.27 11.43,1.27
Header-2.54-1x4 [mil]
  rect 62.99x62.99 hole 39.37: 1(0,0)
  round 60 hole 30: 2(100,0) 3(200,0) 4(300,0)
  silkscreen extent -50,-50 350,50
Hideri-chan [mm]
  silkscreen extent -12.09,-8.15 8.69,15.37
LC-0402_R [mm]
  rect 0.6x0.65 smd mask+0.051: 1(-0.425,0) 2(0.425,0)
  silkscreen extent -0.97,-0.58 0.97,0.58, body extent -0.57,-0.27 0.58,0.28, height 0.41
LED。。 [mm]
  round 1.8 hole 1: A(-1.27,0) K(1.27,0)
  silkscreen extent -1.06,-1.5 1.06,1.5, body extent -2,-2 2,2, height 4.8
SMA(DO-214AC)_S1 [mm]
  rect 2x2 smd: 1(2.1,0) 2(-2.1,0)
  silkscreen extent -2.35,-1.5 2.35,1.5
SOP-8_150mil [mm]
  oval 0.7x1.8 smd: 1(-1.905,-2.6) 2(-0.635,-2.6) 3(0.635,-2.6) 4(1.905,-2.6) 5(1.905,2.6) 6(0.635,2.6) 7(-0.635,2.6) 8(-1.905,2.6)
  silkscreen extent -2.9,-3.07 2.4,1.4, body extent -2.5,-3.1 2.5,3.1, height 1.75
SOP-8_208mil [mm]
  oval 0.6x2.2 smd: 1(-1.905,-3.4) 2(-0.635,-3.4) 3(0.635,-3.4) 4(1.905,-3.4) 5(1.905,3.4) 6(0.635,3.4) 7(-0.635,3.4) 8(-1.905,3.4)
  silkscreen extent -2.88,-4.05 2.5,2
SOT-23(SOT-23-3) [mm]
  rect 1.25x0.7 smd: 1(1.25,-0.95) 2(1.25,0.95) 3(-1.25,0)
  silkscreen extent -0.65,-1.46 0.9,1.46, body extent -1.5,-1.5 1.5,1.5, height 1.3
SOT-223 [mm]
  rect 2.2x1 smd: 1(3,-2.3) 2(3,0) 3(3,2.3)
  rect 2.2x3.5 smd: 2(-3,0)
  silkscreen extent -1.4,-3 1.4,3, body extent -3.49,-3.24 3.49,3.24, height 1.64
TQFP-128_20x14x05P----epad [mm] "TQFP-128_20x14 with EPAD"
  oval 0.28x1.88 smd mask+0.051: 1(-9.25,-8.14) 2(-8.75,-8.14) 3(-8.25,-8.14) 4(-7.75,-8.14) 5(-7.25,-8.14) 6(-6.75,-8.14) 7(-6.25,-8.14) 8(-5.75,-8.14) 9(-5.25,-8.14) 10(-4.75,-8.14) 11(-4.25,-8.14) 12(-3.75,-8.14) 13(-3.25,-8.14) 14(-2.75,-8.14) 15(-2.25,-8.14) 16(-1.75,-8.14) 17(-1.25,-8.14) 18(-0.75,-8.14) 19(-0.25,-8.14) 20(0.25,-8.14) 21(0.75,-8.14) 22(1.25,-8.14) 23(1.75,-8.14) 24(2.25,-8.14) 25(2.75,-8.14) 26(3.25,-8.14) 27(3.75,-8.14) 28(4.25,-8.14) 29(4.75,-8.14) 30(5.25,-8.14) 31(5.75,-8.14) 32(6.25,-8.14) 33(6.75,-8.14) 34(7.25,-8.14) 35(7.75,-8.14) 36(8.25,-8.14) 37(8.75,-8.14) 38(9.25,-8.14) 65(9.25,8.14) 66(8.75,8.14) 67(8.25,8.14) 68(7.75,8.14) 69(7.25,8.14) 70(6.75,8.14) 71(6.25,8.14) 72(5.75,8.14) 73(5.25,8.14) 74(4.75,8.14) 75(4.25,8.14) 76(3.75,8.14) 77(3.25,8.14) 78(2.75,8.14) 79(2.25,8.14) 80(1.75,8.14) 81(1.25,8.14) 82(0.75,8.14) 83(0.25,8.14) 84(-0.25,8.14) 85(-0.75,8.14) 86(-1.25,8.14) 87(-1.75,8.14) 88(-2.25,8.14) 89(-2.75,8.14) 90(-3.25,8.14) 91(-3.75,8.14) 92(-4.25,8.14) 93(-4.75,8.14) 94(-5.25,8.14) 95(-5.75,8.14) 96(-6.25,8.14) 97(-6.75,8.14) 98(-7.25,8.14) 99(-7.75,8.14) 100(-8.25,8.14) 101(-8.75,8.14) 102(-9.25,8.14)
  oval 1.88x0.28 smd mask+0.051: 39(11.14,-6.25) 40(11.14,-5.75) 41(11.14,-5.25) 42(11.14,-4.75) 43(11.14,-4.25) 44(11.14,-3.75) 45(11.14,-3.25) 46(11.14,-2.75) 47(11.14,-2.25) 48(11.14,-1.75) 49(11.14,-1.25) 50(11.14,-0.75) 51(11.14,-0.25) 52(11.14,0.25) 53(11.14,0.75) 54(11.14,1.25) 55(11.14,1.75) 56(11.14,2.25) 57(11.14,2.75) 58(11.14,3.25) 59(11.14,3.75) 60(11.14,4.25) 61(11.14,4.75) 62(11.14,5.25) 63(11.14,5.75) 64(11.14,6.25) 103(-11.14,6.25) 104(-11.14,5.75) 105(-11.14,5.25) 106(-11.14,4.75) 107(-11.14,4.25) 108(-11.14,3.75) 109(-11.14,3.25) 110(-11.14,2.75) 111(-11.14,2.25) 112(-11.14,1.75) 113(-11.14,1.25) 114(-11.14,0.75) 115(-11.14,0.25) 116(-11.14,-0.25) 117(-11.14,-0.75) 118(-11.14,-1.25) 119(-11.14,-1.75) 120(-11.14,-2.25) 121(-11.14,-2.75) 122(-11.14,-3.25) 123(-11.14,-3.75) 124(-11.14,-4.25) 125(-11.14,-4.75) 126(-11.14,-5.25) 127(-11.14,-5.75) 128(-11.14,-6.25)
  rect 6.6x6.1 hole 3: 129(0,0)
  silkscreen extent -10.15,-8.75 9.8,6.8
TSOT-23-8 [mm]
  rect 0.4x1.1 smd mask+0.051: 1(-0.975,-1.3) 2(-0.325,-1.3) 3(0.325,-1.3) 4(0.975,-1.3) 5(0.975,1.3) 6(0.325,1.3) 7(-0.325,1.3) 8(-0.975,1.3)
  silkscreen extent -1.85,-1.65 1.38,0.4

## Part data
C1 C2 C3 C7 C8 C9 C10 C11 C12 C13 C14 C15 C16 C17 C18 C19 C20 C21 C22 C23 C25 C26 C27 C28 C29 C30 C31 C32 C33 C34 C35 C36 C37 C38 C39 C40 C41 C43 C44 C45 C46 C48 C49 C50 C51 C52 C53 C54 C58 C59 C60 C61 C62 C63 C64 C65 C66 C67 C68 C69 C70 C71 C72 C74 C75 C76 C77 C78 C79 C80 C81 C82 C83 C85 C86 C87 C88 C89 C90 C91 C92 C93: "Capacitor", LatestRevisionDate=17-Jul-2002, LatestRevisionNote="Re-released for DXP Platform.", PackageDescription="Radial Cap, Thru-Hole; 2 Leads; 0.3 in Pin Spacing", PackageReference=RAD-0.3, Published=8-Jun-2000, Publisher="Altium Limited"
C4 C6: library part SMT_C_0402, "Surface mount capacitor 0402"
C5: library part SMT_C_Tantalum_B, "Capacitor, SM Tantalum; Body 3.5 x 2.8 mm (LxW typ)"
C47 C55 C56 C57 C73 C84 C94: "Polarized Capacitor (Radial)", LatestRevisionDate=17-Jul-2002, LatestRevisionNote="Re-released for DXP Platform.", PackageDescription="Polarized Capacitor (Radial); 2 Leads", PackageReference=RB7.6-15, Published=8-Jun-2000, Publisher="Altium Limited"
D1 D2 D3 D4 D5 D6 D7 D8: "Typical INFRARED GaAs LED", LatestRevisionDate=08-Jul-2005, LatestRevisionNote="Mech Layer 1 removed.", PackageDescription="LED; 2 Leads", PackageReference=LED-0, Published=8-Jun-2000, Publisher="Altium Limited"
D9: library part LED0, "Typical INFRARED GaAs LED", LatestRevisionDate=08-Jul-2005, LatestRevisionNote="Mech Layer 1 removed.", PackageDescription="LED; 2 Leads", PackageReference=LED-0, Published=8-Jun-2000, Publisher="Altium Limited"
D10: library part "SMA(DO-214AC) M7", "二极管", Package=SMA(DO-214AC), SuppliersPartNumber=C95872, ComponentLink1Description=供应商链接, ComponentLink1URL=http://www.szlcsc.com/product/details_2841.html, Supplier=LC, 备注="1N4007 4007 编号C2464 已经停售, 使用新物料编号C95872"
LED1: library part SMT_LED_0603, "SMT LED"
LS1: "Magnetic Transducer Buzzer", ComponentLink1Description="Manufacturer Link", ComponentLink1URL=http://www.megastar.com/linecard/buzzmode/index.php, DatasheetVersion=17-Dec-2003, LatestRevisionDate=17-Dec-2003, LatestRevisionNote="Schematic revised, PCB Footprint replaced.", PackageDescription="Magnetic Transducer Buzzer", PackageReference=ABSM-1574, Published=24-Mar-1999, Publisher="Altium Limited"
R1 R2: "Single-Pole, Single-Throw Switch", LatestRevisionDate=17-Jul-2002, LatestRevisionNote="Re-released for DXP Platform.", PackageDescription="Switch; 2 Leads", PackageReference=SPST-2, Published=24-Mar-1999, Publisher="Altium Limited"
R1 R2 R3 R4 R5 R6 R7 R8 R9 R10 R11 R12 R13 R14 R15 R16 R17 R18 R19 R20 R21 R22 R23 R24 R25 R26 R27 R28 R29 R30 R31 R33 R34 R35 R36 R44 R45 R46 R47 R48 R49 R50 R51 R52 R53 R54 R55 R56 R57 R58 R59 R60 R61 R62 R63 R64 R65 R66 R67 R68 R69 R70 R71 R72 R73 R74 R75 R76 R77 R79 R80 R81 R82: "Resistor", LatestRevisionDate=17-Jul-2002, LatestRevisionNote="Re-released for DXP Platform.", PackageDescription="Axial Device, Thru-Hole; 2 Leads; 0.4 in Pin Spacing", PackageReference=AXIAL-0.4, Published=8-Jun-2000, Publisher="Altium Limited"
R32 R37 R38 R39 R40 R41 R42 R43: library part SMT_R_0402, "Surface mount resistor 0402"
S1 S2: library part SMT_SW_PTS_820, "SMT Tactile ?Switch PTS 820 Series"
VT1 VT2: library part SMT_TRIODE_NPN, "Surface mount NPN transistor, package SOT-23"
Y1: "Crystal Oscillator", LatestRevisionDate=17-Jul-2002, LatestRevisionNote="Re-released for DXP Platform.", PackageDescription="Crystal, Thru-Hole; 2 Leads; Body 3.1 x 8.2 mm (Dia.xH)", PackageReference=R38, Published=8-Jun-2000, Publisher="Altium Limited"
L1 L4 L5 L6 L7 L8 L9: Code_IEC=1005, Code_JEITA=0402, LatestRevisionDate=29-May-2009, LatestRevisionNote="IPC-7351 Footprint Added.", PackageDescription="Chip Inductor", PackageReference=0402-A, Published=8-Jun-2000, Publisher="Altium Limited"

## Via types
v1: diameter 0.61, hole 0.305, Top Layer to Bottom Layer, 609 vias
v2: diameter 0.711, hole 0.305, Top Layer to Bottom Layer, 5 vias

## Nets (pads, with @x,y where several pads share a name; then routed paths per layer and width w, separated by ;. In a path a pad name is that pad's centre, name@x,y a point inside that pad or via, vN(x,y) a via of type N, cw(c..) or ccw(c..) an arc to the next point about the centre after c; other vN are vias at no path point)
AMS1117_OUT: C84.2 C85.2 L9.2 U8.2
AVDDH: C45.2 C74.2 C75.2 C76.2 C77.2 C78.2 C79.2 C80.2 C81.2 C82.2 C83.2 L7.2 R1.1@65.1,67.139 R2.1@68.529,67.139 R14.2 R16.1 R17.1 R18.1 R19.1 R27.2 R28.2 RTL1.5 RTL1.15 RTL1.19 RTL1.24 RTL1.34 RTL1.54 RTL1.64 RTL1.77 RTL1.96 RTL1.102 RTL1.112 U1.8 | length 169
  Top Layer w0.152: v1(62.814,66.269) R17.1@62.814,67.139 ; v1(63.957,66.294) R16.1@63.957,67.139 ; v1(65.1,66.269) R1.1@65.1,67.139 ; v1(66.243,66.269) R19.1@66.243,67.139 ; C45.2@66.269,63.431 C45.2@66.501,63.431 ; v1(67.386,66.269) R18.1@67.386,67.139 ; v1(68.529,66.269) R2.1@68.529,67.139 ; R14.2@68.555,64.281 68.555,65.101 69.672,66.219 v1(69.672,66.269) R27.2@69.672,67.139 ; R28.2@69.672,70.111 70.427,70.111 v1(70.536,70.002)
  Top Layer w0.254: v1(50.114,54.178) 50.251,54.315 RTL1.112@51.88,54.315 ; v1(53.823,41.605) 54.051,41.605 55.77,43.324 RTL1.5@55.77,44.425 ; RTL1.96@56.77,60.705 56.77,62.231 v1(56.82,62.281) ; v1(60.63,42.951) 60.77,43.092 RTL1.15@60.77,44.425 ; RTL1.19@62.77,44.425 62.77,43.072 v1(62.916,42.926) ; v1(65.202,42.977) 65.27,43.045 RTL1.24@65.27,44.425 ; v1(66.269,62.205) 66.27,62.203 RTL1.77@66.27,60.705 ; RTL1.34@70.27,44.425 70.27,43.115 v1(70.51,42.875) ; RTL1.54@74.16,53.815 74.168,53.823 v1(75.844,53.823)
  Top Layer w0.305: 53.571,60.858 RTL1.102@53.724,60.705
  Top Layer w0.508: C74.2@48.948,54.178 v1(50.114,54.178) ; C77.2@51.276,61.112 52.883,61.112 v1(53.137,60.858) 53.571,60.858 ; C78.2@53.028,41.605 v1(53.823,41.605) ; C79.2@56.718,63.431 56.718,62.382 v1(56.82,62.281) ; C80.2@60.63,42.005 v1(60.63,42.951) ; C82.2@62.916,41.998 v1(62.916,42.926) ; C83.2@65.202,41.979 v1(65.202,42.977) ; v1(66.269,62.205) C45.2@66.269,63.431 ; v1(70.51,42.875) C81.2@71.433,41.952 ; v1(75.844,53.823) C75.2@76.976,53.823 ; v1(76.073,68.123) 76.073,65.126 75.184,64.237 75.184,62.738 77.212,60.71
  Top Layer w1.27: v1(55.423,54.331) 55.423,56.45 56.123,57.15 70.688,57.15 70.714,57.175 ; v1(56.622,48.108) 70.124,48.108 70.587,48.57 70.587,56.744 70.469,56.744 73.289,59.563 76.065,59.563 77.212,60.71 L7.2@79.316,62.814
  Bottom Layer w0.305: v1(62.814,66.269) v1(65.1,66.269) v1(66.243,66.269) v1(67.386,66.269) v1(68.529,66.269) v1(69.672,66.269) ; v1(70.536,70.002) 70.536,69.667 69.672,68.803 v1(69.672,66.269) ; v1(76.073,68.123) 76.048,68.097 72.95,68.097 72.925,68.123 72.39,68.123 70.536,66.269 v1(69.672,66.269)
  Bottom Layer w0.406: v1@60.603,47.693 60.603,42.978 v1(60.63,42.951)
  Bottom Layer w0.508: v1(50.114,54.178) v1@50.267,54.331 ; v1(53.823,41.605) 54.051,41.605 55.778,43.332 55.778,47.264 v1(56.622,48.108) ; v1(56.82,62.281) v1@56.871,62.23 ; v1(66.269,57.48) v1(66.269,62.205) ; v1@70.333,43.053 70.358,43.028 v1(70.51,42.875) ; v1(70.815,53.365) 72.923,53.365 73.381,53.823 v1(75.844,53.823)
  Bottom Layer w0.61: v1@50.267,54.331 v1(55.423,54.331) ; v1(53.137,60.858) 53.137,59.385 v1(55.524,56.998) ; v1(56.871,57.48) v1@56.871,62.23 ; v1(62.916,42.926) v1(62.916,47.777) ; v1(65.202,42.977) v1(65.202,47.752) ; v1@70.333,43.053 v1(70.333,47.854)
  other v1: 60.63,47.777
AVDDL: C49.2 C50.2 C64.2 C65.2 C66.2 C67.2 C68.2 C69.2 C70.2 C71.2 C72.2 C86.2 C87.2 C88.2 C89.2 C90.2 C91.2 C92.2 C93.2 L8.1 RTL1.10 RTL1.18 RTL1.20 RTL1.21 RTL1.22 RTL1.23 RTL1.29 RTL1.39 RTL1.44 RTL1.49 RTL1.59 RTL1.76 RTL1.78 RTL1.92 RTL1.95 RTL1.107 RTL1.117 RTL1.122 RTL1.128 | length 163.3
  Top Layer w0.152: RTL1.18@62.27,44.425 RTL1.18@62.332,44.364 ; C91.2@63.475,39.846 63.505,39.876 63.505,41.543 63.961,41.998 C93.2@64.059,41.998 64.157,41.998 64.612,41.543 64.612,39.876 C88.2@64.643,39.846
  Top Layer w0.254: C66.2@48.948,45.745 50.47,45.745 51.04,46.315 RTL1.128@51.88,46.315 53.122,46.315 54.712,47.904 ; C50.2@48.948,48.844 50.515,48.844 50.986,49.315 RTL1.122@51.88,49.315 53.963,49.315 54,49.352 ; C71.2@48.948,51.283 49.987,51.283 50.52,51.815 RTL1.117@51.88,51.815 53.949,51.815 54,51.867 ; C67.2@48.948,57.023 50.546,57.023 50.754,56.815 RTL1.107@51.88,56.815 53.776,56.815 ; 54.762,47.955 55.042,48.235 ; 57.277,58.572 57.27,58.579 RTL1.95@57.27,60.705 57.27,61.893 57.861,62.484 C86.2@57.861,63.431 ; C65.2@57.506,41.808 58.27,42.573 RTL1.10@58.27,44.425 58.27,46.594 ; 58.27,46.632 58.27,46.685 ; 58.75,58.572 58.77,58.592 RTL1.92@58.77,60.705 58.77,62.098 59.207,62.535 C92.2@59.207,63.431 ; C89.2@61.773,42.005 62.27,42.502 RTL1.18@62.27,44.425 62.27,46.675 62.27,46.685 ; RTL1.20@63.27,44.425 63.27,46.633 63.27,46.685 ; C87.2@65.126,63.431 65.126,62.521 65.77,61.877 RTL1.78@65.77,60.705 65.77,59.045 66.243,58.572 66.77,59.099 RTL1.76@66.77,60.705 66.77,61.88 67.412,62.521 C90.2@67.412,63.431 ; 67.742,46.634 67.77,46.606 RTL1.29@67.77,44.425 67.77,42.002 C64.2@67.793,41.979 ; 71.387,47.358 72.43,46.315 RTL1.39@74.16,46.315 74.944,46.315 75.75,45.51 C72.2@75.75,44.882 ; 72.034,48.844 72.063,48.815 RTL1.44@74.16,48.815 74.164,48.819 C49.2@76.987,48.819 ; 72.034,51.308 72.042,51.315 RTL1.49@74.16,51.315 76.867,51.315 C68.2@76.976,51.206 ; v1(72.034,56.286) 72.063,56.315 RTL1.59@74.16,56.315 76.947,56.315 C70.2@76.976,56.286
  Top Layer w0.762: C93.2@64.059,41.998 64.059,44.214
  Top Layer w1.016: RTL1.21@63.77,43.925 RTL1.21@63.77,44.425 63.77,46.32 64.083,46.633 64.084,46.634 ; 64.135,46.685 64.084,46.634 ; 64.414,43.917 64.414,46.304 64.085,46.633 64.084,46.634
  Top Layer w1.27: 53.776,56.815 55.534,58.572 57.277,58.572 58.75,58.572 66.243,58.572 ; 54,56.591 54,51.867 54,49.352 54,48.717 54.762,47.955 56.032,46.685 58.179,46.685 58.27,46.594 ; 58.27,46.685 62.27,46.685 ; 62.27,46.675 62.281,46.685 63.218,46.685 63.27,46.633 ; 63.27,46.685 64.135,46.685 ; 64.083,46.633 64.085,46.633 64.947,46.633 64.948,46.634 ; 64.084,46.634 64.948,46.634 ; v1(72.034,56.286) v1(72.034,55.385) v1(72.034,54.483) 72.034,51.308 72.034,48.844 72.034,48.006 71.387,47.358 70.688,46.66 64.973,46.66 64.948,46.634 ; v1@76.556,63.119 v1(77.089,63.652) v1(77.622,64.186) 79.121,65.684 79.121,69.41 L8.1@79.282,69.571
  Bottom Layer w1.27: v1(72.034,54.483) v1(72.034,55.385) v1(72.034,56.286) 72.034,58.598 v1(77.089,63.652) v1(77.622,64.186)
  other v1: 76.581,63.094
DTR: J1.4 R42.2 VT2.2 | length 26.3
  Top Layer w0.152: VT2.2@24.277,62.931 25.248,61.96 R42.2@25.248,61.036 ; v1(24.486,61.798) R42.2@25.248,61.036 ; R42.2@25.248,60.985 R42.2@25.248,61.036
  Bottom Layer w0.152: J1.4@4.572,63.195 4.572,64.11 5.893,65.43 11.482,65.43 13.336,63.576 22.06,63.576 22.289,63.348 22.936,63.348 v1(24.486,61.798)
EN_PHY: R17.2 R23.1 RTL1.91 | length 10.9
  Top Layer w0.152: RTL1.91@59.27,60.705 59.27,61.836 60.935,63.5 60.935,65.278 62.179,66.523 62.179,67.452 62.716,67.989 R17.2@62.814,67.989 62.814,70.085 R23.1@62.789,70.111